# Altium PCB PCB Bottani.PcbDoc
Units mm, origin at the board's own origin, x right, y up, seen from the top; angles counter-clockwise.
Board outline 72.94 x 69.34 mm, 2 copper layers (Top Layer, Bottom Layer); 20 components, 36 nets, 133 pads, 8 vias.
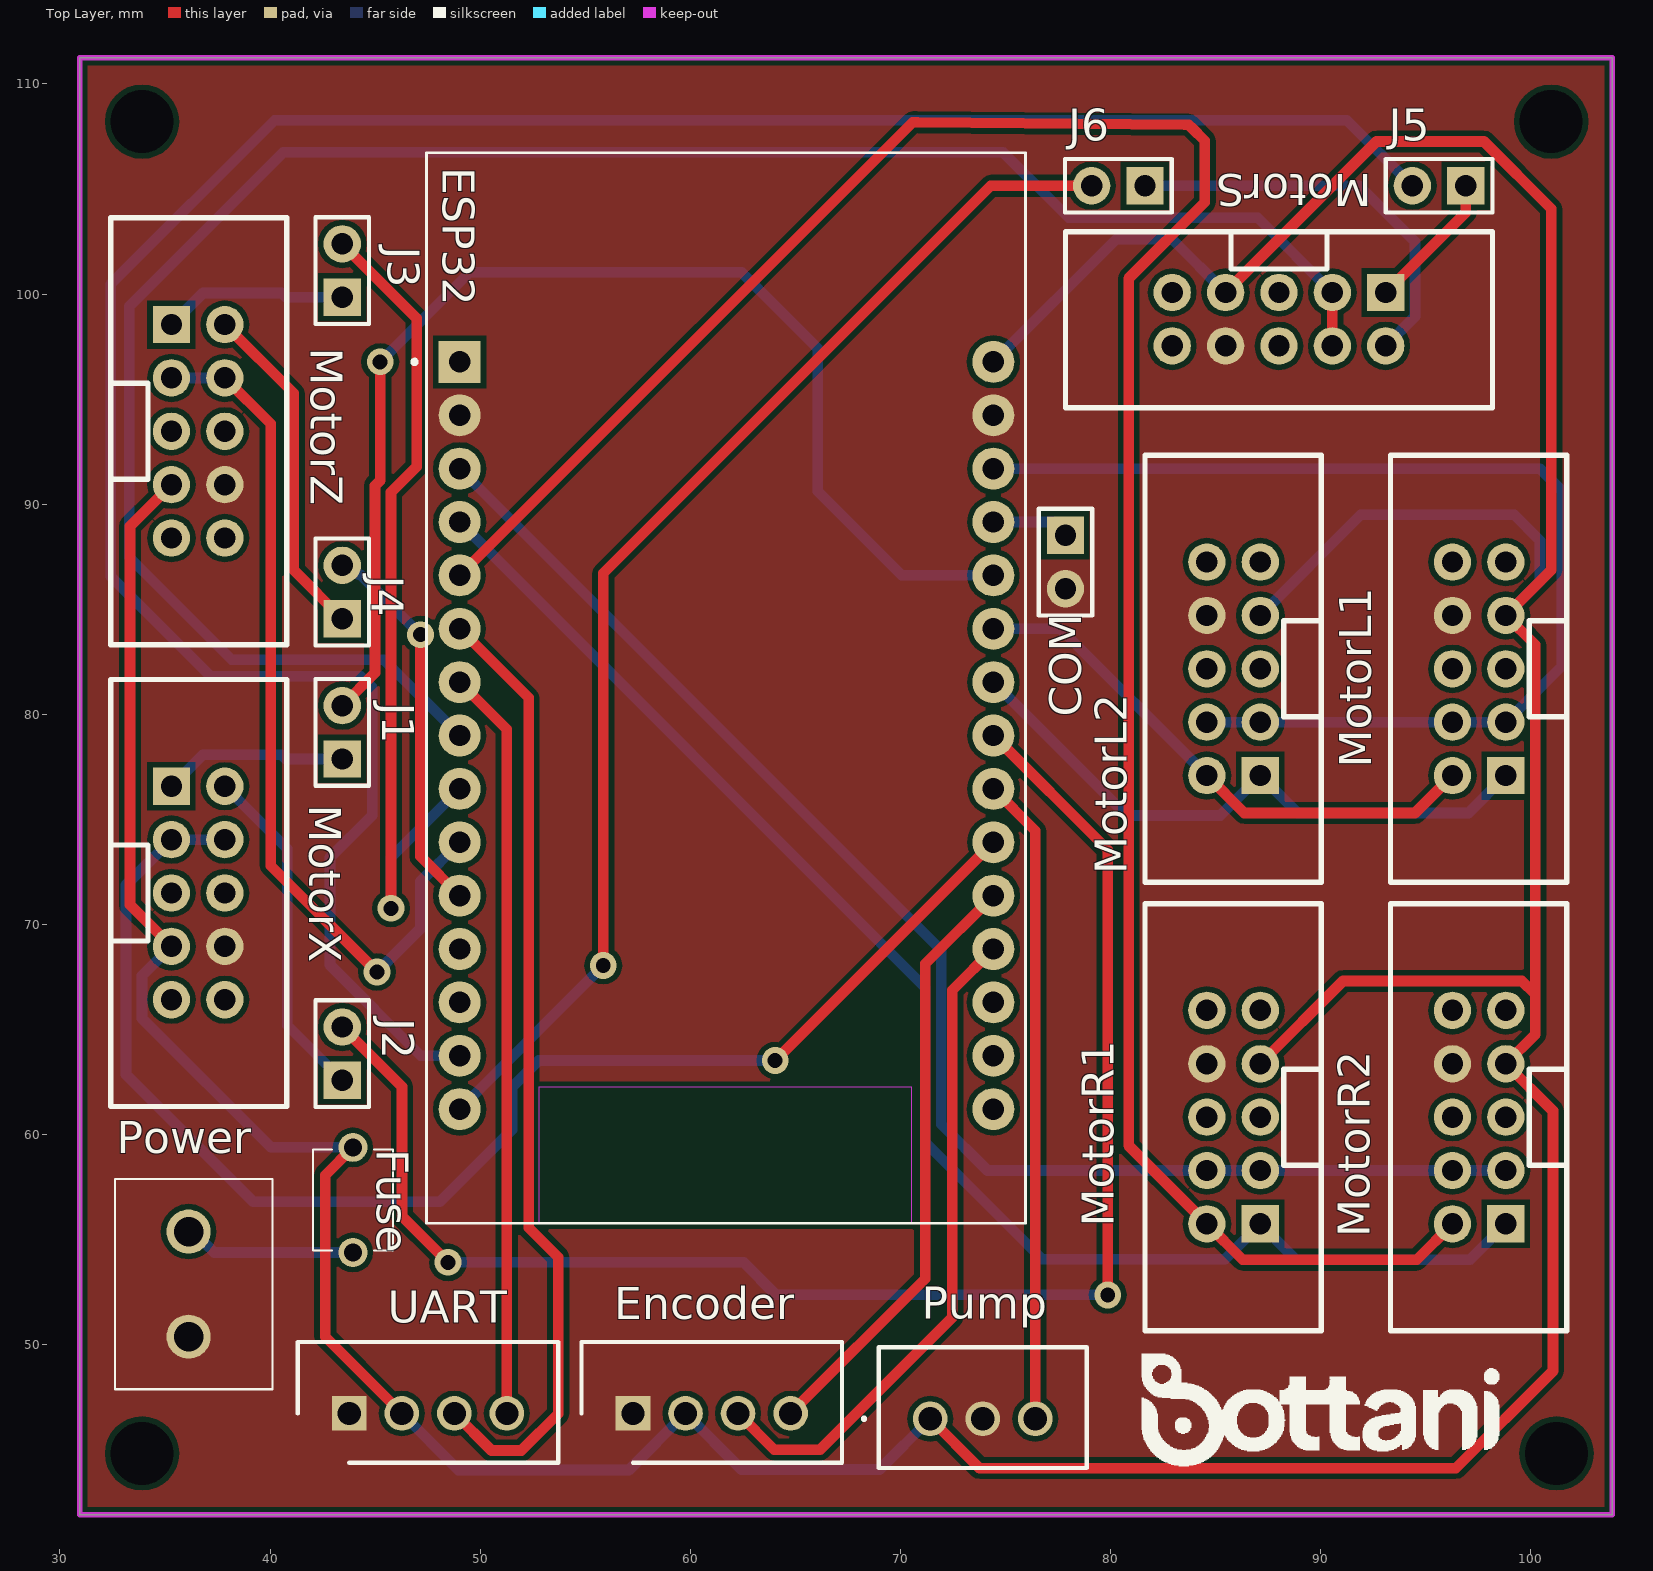
[diagram p0: Top Layer view]
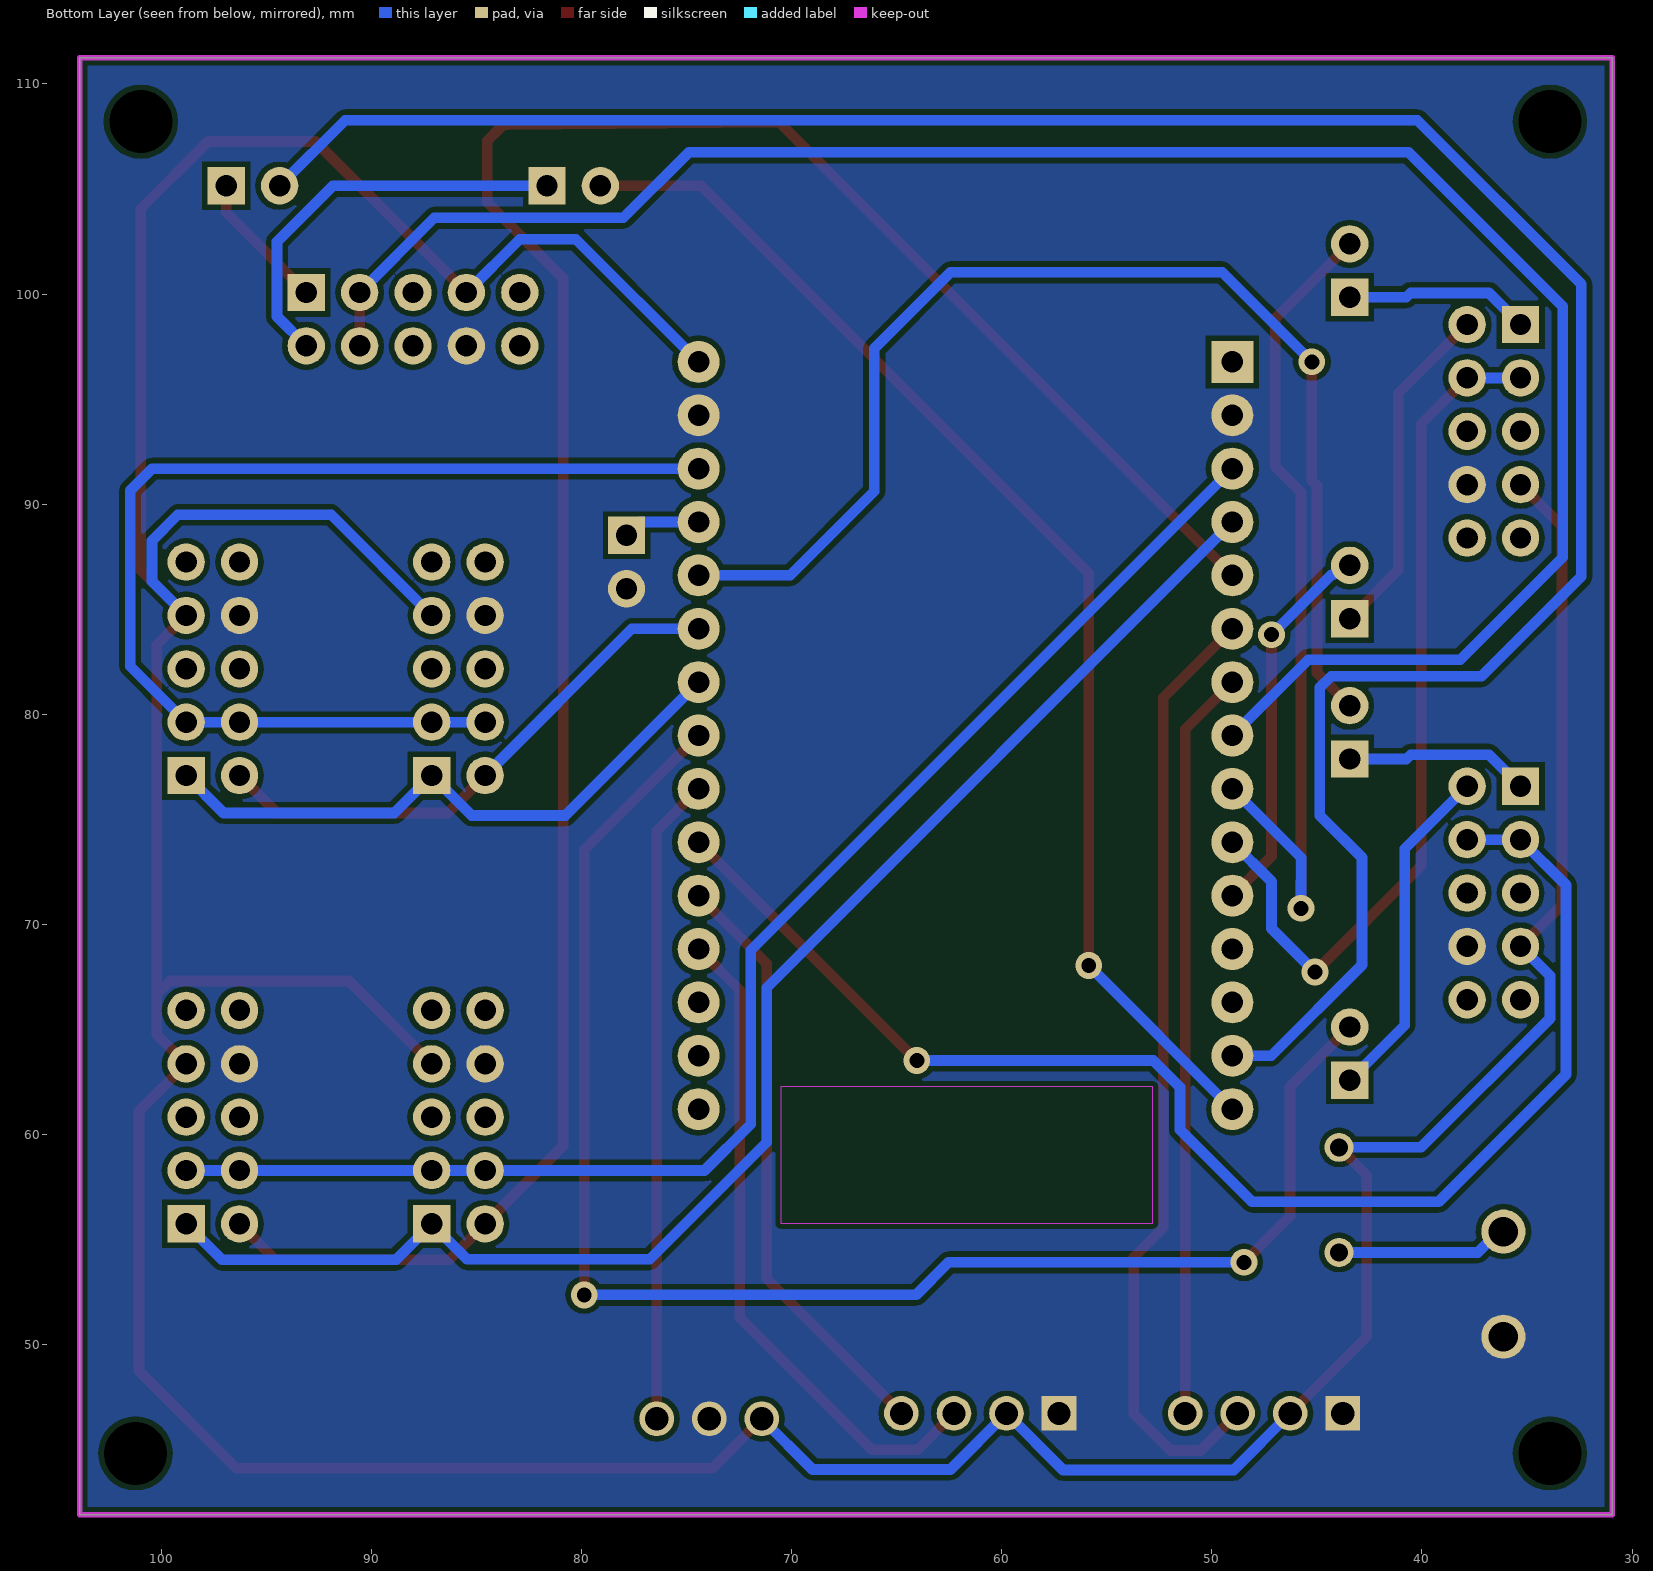
[diagram p1: Bottom Layer view, seen from below]
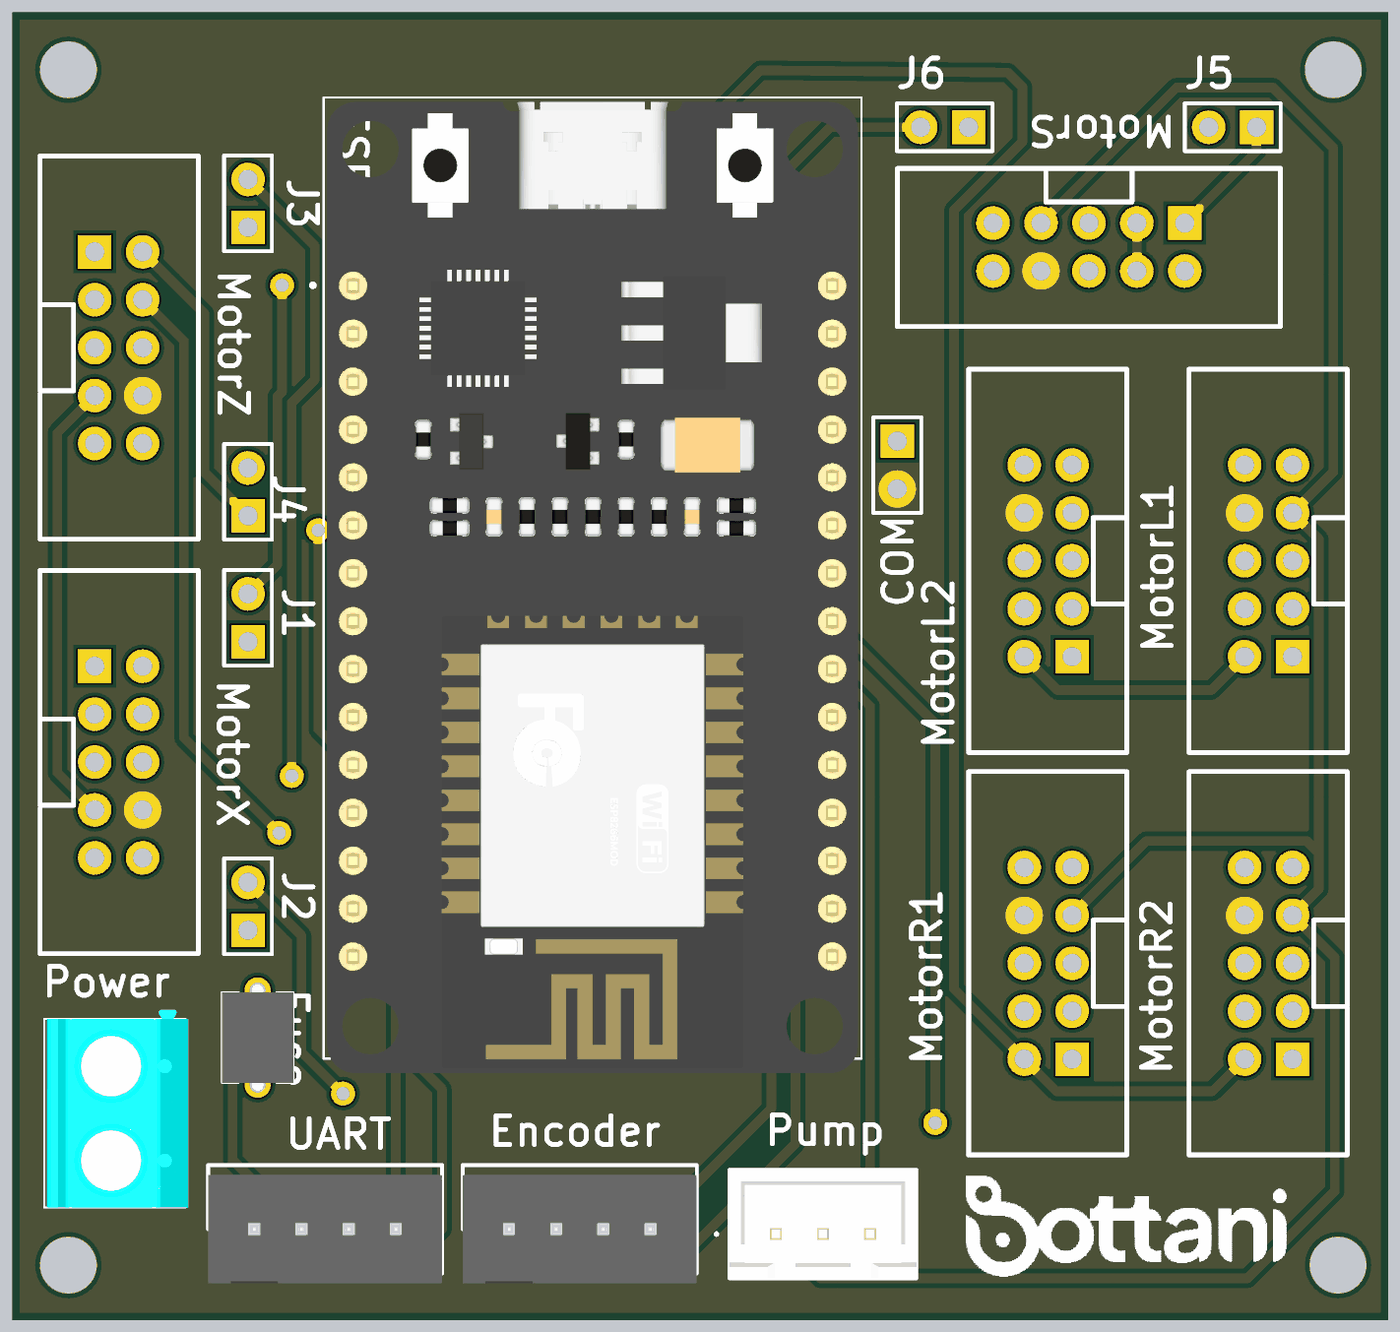
[diagram p2: 3D render of the assembled board from above, using the file's embedded part models]

## Layer stack, top to bottom
Top Solder: solder mask 0.0102, Solder Resist, Dk 3.5
Top Layer: signal copper 0.0356
Dielectric 1: dielectric 0.32, FR-4, Dk 4.8
Bottom Layer: signal copper 0.0356
Bottom Solder: solder mask 0.0102, Solder Resist, Dk 3.5

## Board outline
30.939,111.252 103.875,111.252 103.875,41.91 30.939,41.91

## Design rules (kind name [scope] priority, off if disabled: settings)
Clearance [All] p1: gap=0.254 ignorepadtopadclearanceinfootprint=FALSE except(0: Arc-Hole Track-Hole SMDPad-Hole THPad-Hole Via-Hole Fill-Hole Poly-Hole Region-Hole Text-Hole)
DiffPairsRouting [All] p1: maxlimit=0.254 minlimit=0.254 mostfreqgap=0.254 toplayer_minwidth=0.381 toplayer_maxwidth=0.381 toplayer_prefwidth=0.381 bottomlayer_minwidth=0.381 bottomlayer_maxwidth=0.381 bottomlayer_prefwidth=0.381 substack1={1001AADD-83BE-48A7-A24E-CF175915C0E7} toplayer_{1001aadd-83be-48a7-a24e-cf175915c0e7}_minwidth=0.381 toplayer_{1001aadd-83be-48a7-a24e-cf175915c0e7}_maxwidth=0.381 toplayer_{1001aadd-83be-48a7-a24e-cf175915c0e7}_prefwidth=0.381 bottomlayer_{1001aadd-83be-48a7-a24e-cf175915c0e7}_minwidth=0.381 bottomlayer_{1001aadd-83be-48a7-a24e-cf175915c0e7}_maxwidth=0.381 bottomlayer_{1001aadd-83be-48a7-a24e-cf175915c0e7}_prefwidth=0.381 substack2={67FADA1C-12DB-4CC4-97FB-3170CE7262F9} toplayer_{67fada1c-12db-4cc4-97fb-3170ce7262f9}_minwidth=0.381 toplayer_{67fada1c-12db-4cc4-97fb-3170ce7262f9}_maxwidth=0.381 toplayer_{67fada1c-12db-4cc4-97fb-3170ce7262f9}_prefwidth=0.381 bottomlayer_{67fada1c-12db-4cc4-97fb-3170ce7262f9}_minwidth=0.381 bottomlayer_{67fada1c-12db-4cc4-97fb-3170ce7262f9}_maxwidth=0.381 bottomlayer_{67fada1c-12db-4cc4-97fb-3170ce7262f9}_prefwidth=0.381 substack3={078A5EBC-2FAC-4886-BE61-738B36AD6FFA} toplayer_{078a5ebc-2fac-4886-be61-738b36ad6ffa}_minwidth=0.381 toplayer_{078a5ebc-2fac-4886-be61-738b36ad6ffa}_maxwidth=0.381 toplayer_{078a5ebc-2fac-4886-be61-738b36ad6ffa}_prefwidth=0.381 bottomlayer_{078a5ebc-2fac-4886-be61-738b36ad6ffa}_minwidth=0.381 bottomlayer_{078a5ebc-2fac-4886-be61-738b36ad6ffa}_maxwidth=0.381 bottomlayer_{078a5ebc-2fac-4886-be61-738b36ad6ffa}_prefwidth=0.381 maxuncoupledlength=12.7
PolygonConnect [All] p1: connectstyle=Direct reliefconductorwidth=0.254 reliefentries=4 polygonreliefangle="90 Angle" airgapwidth=0.254
RoutingVias [All] p1: holewidth=0.711 width=1.27 viastyle="Through Hole" minholewidth=0.711 minwidth=1.27 maxholewidth=0.711 maxwidth=1.27
SolderMaskExpansion [All] p1: expansion=0.102 istentingtop=FALSE
Width [All] p1: maxlimit=0.762 minlimit=0.254 preferedwidth=0.508 minimp=50.000000 maximp=50.000000 favimp=50.000000
29 further rules are at their usual default settings.

## Components (designator, comment, footprint, x,y, rotation, side; value= is the part's Value field where it differs from the comment)
COM "Header 2 Male" "Header 2 Male" 77.851,88.518 r270 top
Encoder "B4B-XH-A_LF__SN_" SHDR4W64P0X250_1X4_1240X575X700P 57.27,46.736 r0 top
ESP32 "ESP32-DEVKIT-V1" esp32_30p 61.722,81.259 r0 top (schematic designator U?)
Fuse "TRF250-080U" TRF250080U 43.942,56.896 r270 top
J1 "Header 2 Male" "Header 2 Male" 43.434,77.878 r90 top
J2 "Header 2 Male" "Header 2 Male" 43.434,62.584 r90 top
J3 "Header 2 Male" "Header 2 Male" 43.434,99.849 r90 top
J4 "Header 2 Male" "Header 2 Male" 43.434,84.555 r90 top
J5 "Header 2 Male" "Header 2 Male" 96.901,105.156 r180 top
J6 "Header 2 Male" "Header 2 Male" 81.634,105.156 r180 top
MotorL1 "Header ISP" "Header ISP" 101.346,79.629 r90 top
MotorL2 "Header ISP" "Header ISP" 89.662,79.629 r90 top
MotorR1 "Header ISP" "Header ISP" 89.662,58.293 r90 top
MotorR2 "Header ISP" "Header ISP" 101.346,58.293 r90 top
MotorS "Header ISP" "Header ISP" 90.551,102.616 r180 top
MotorX "Header ISP" "Header ISP" 32.766,74.041 r270 top
MotorZ "Header ISP" "Header ISP" 32.766,96.012 r270 top
Power "KF301-2P" KF3012P 36.124,55.386 r270 top
Pump "B3B-XH-A_LF__SN_" B3BXHALFSN 71.414,46.482 r0 top
UART "B4B-XH-A_LF__SN_" SHDR4W64P0X250_1X4_1240X575X700P 43.768,46.736 r0 top

## Footprints (in the part's own frame and the unit in brackets; to place one, negate y for a bottom-side part, rotate by r counter-clockwise, add the part's x,y. Pads: shape width x height; smd on the part's side, far side on the other; paste and mask are expansions set on the pad)
B3BXHALFSN [mm]
  round 1.65 hole 1.1: 1(0,0) 2(2.5,0) 3(5,0)
  silkscreen extent -3.2,-2.35 7.45,3.4, body extent -2.45,-2.35 7.45,3.4, height 7.09
esp32_30p [mm]
  rect 2x2 / inner round 2 / far side rect 2x2 hole 1.02: 1(-12.7,15.515)
  round 2 hole 1.02: 2(-12.7,12.975) 3(-12.7,10.435) 4(-12.7,7.895) 5(-12.7,5.355) 6(-12.7,2.815) 7(-12.7,0.275) 8(-12.7,-2.265) 9(-12.7,-4.805) 10(-12.7,-7.345) 11(-12.7,-9.885) 12(-12.7,-12.425) 13(-12.7,-14.965) 14(-12.7,-17.505) 15(-12.7,-20.045) 16(12.7,-20.045) 17(12.7,-17.505) 18(12.7,-14.965) 19(12.7,-12.425) 20(12.7,-9.885) 21(12.7,-7.345) 22(12.7,-4.805) 23(12.7,-2.265) 24(12.7,0.275) 25(12.7,2.815) 26(12.7,5.355) 27(12.7,7.895) 28(12.7,10.435) 29(12.7,12.975) 30(12.7,15.515)
  Keep-Out Layer region: 8.78,-25.475 -8.91,-25.475 -8.91,-18.985 8.78,-18.985
  Keep-Out Layer region: 8.78,-25.475 -8.91,-25.475 -8.91,-18.985 8.78,-18.985
  silkscreen extent -14.95,-25.48 14.23,25.48, body extent -14.1,-26.26 14.05,25.24, height 14.37
"Header 2 Male" [mil]
  rect 70x70 hole 40: 1(0,0)
  round 70 hole 40: 2(100,0)
  silkscreen extent -50,-50 150,50, body extent -50,-50 150,50, height 327
"Header ISP" [mil]
  rect 70x70 hole 40: 1(-100,100)
  round 70 hole 40: 2(-100,200) 3(0,100) 4(0,200) 5(100,100) 6(100,200) 7(200,100) 8(200,200) 9(300,100) 10(300,200)
  silkscreen extent -300,-14 500,316, body extent -300,-20 501,334, height 365
KF3012P [mm]
  round 2.1 hole 1.4: 1(0,0) 2(5,0)
  silkscreen extent -2.5,-3.5 7.5,4, body extent -2.99,-3.35 7.51,4.15, height 10
SHDR4W64P0X250_1X4_1240X575X700P [mm]
  rect 1.65x1.65 hole 1.1: 1(0,0)
  round 1.65 hole 1.1: 2(2.5,0) 3(5,0) 4(7.5,0)
  silkscreen extent -2.45,-2.35 9.95,3.4, body extent -2.45,-2.88 9.95,2.88, height 7
TRF250080U [mm]
  round 1.381 hole 0.85: 1(-2.5,0) 2(2.5,0)
  silkscreen extent -2.4,-1.9 2.4,1.9, body extent -2.82,-1.9 2.83,1.9, height 9.4

## Part data
Encoder UART: "Connector", Manufacturer_Name="JST (JAPAN SOLDERLESS TERMINALS)", Manufacturer_Part_Number=B4B-XH-A(LF)(SN), Datasheet Link=http://uk.rs-online.com/web/p/products/8201551, Height=7mm
ESP32: "Dual core, Wi-Fi: 2.4 GHz up to 150 Mbits/s,BLE (Bluetooth Low Energy) and legacy Bluetooth, 32 bits, Up to 240 MHz", Package=None, Availability="Not in stock", Check_prices=https://www.snapeda.com/parts/ESP32-DEVKIT-V1/Do+it/view-part/?ref=eda, MF="Do it", MP=ESP32-DEVKIT-V1, Price=None, SnapEDA_Link=https://www.snapeda.com/parts/ESP32-DEVKIT-V1/Do+it/view-part/?ref=snap
Fuse: "Fuse", Manufacturer_Name=LITTELFUSE, Mouser Part Number=650-TRF250-080U, Arrow Part Number=TRF250-080U, Arrow Price/Stock=https://www.arrow.com/en/products/trf250-080u/littelfuse, Datasheet Link=https://www.littelfuse.com/~/media/electronics/product_specifications/resettable_ptcs/littelfuse_ptc_trf250_080u_product_specification.pdf.pdf, Height=9.3mm, Manufacturer_Part_Number=TRF250-080U, Mouser Price/Stock=https://www.mouser.co.uk/ProductDetail/Littelfuse/TRF250-080U?qs=iWbXB9lueyAgWrbRiwwadg%3D%3D
Power: "Connector", Manufacturer_Name="Handson Technology", Datasheet Link=http://www.handsontec.com/dataspecs/terminal%20block-5mm.pdf, Height=10mm, Manufacturer_Part_Number=KF301-2P
Pump: "Connector", Arrow Part Number=B3B-XH-A(LF)(SN), Manufacturer_Name="JST (JAPAN SOLDERLESS TERMINALS)", Arrow Price/Stock=https://www.arrow.com/en/products/b3b-xh-a-lf-sn/jst-manufacturing?region=europe, Datasheet Link=https://datasheet.lcsc.com/szlcsc/1812131720_JST-Sales-America-B3B-XH-A-LF-SN_C144394.pdf, Height=7mm, Manufacturer_Part_Number=B3B-XH-A(LF)(SN)

## Free pads (board coordinates)
  round 1.524 hole 3: 46(33.909,44.831) 46(33.909,108.204) 46(100.965,108.204) 46(101.219,44.831)

## Via types
v1: diameter 1.27, hole 0.711, Top Layer to Bottom Layer, 8 vias

## Nets (pads, with @x,y where several pads share a name; then routed paths per layer and width w, separated by ;. In a path a pad name is that pad's centre, name@x,y a point inside that pad or via, vN(x,y) a via of type N, cw(c..) or ccw(c..) an arc to the next point about the centre after c; other vN are vias at no path point)
3V3: ESP32.1
5V: Encoder.2 ESP32.30 Fuse.1 MotorL1.7 MotorL2.7 MotorR1.7 MotorR2.7 MotorS.7 MotorX.7 MotorZ.7 Pump.1 UART.2 | length 244.5
  Top Layer w0.508: MotorX.7 33.331,70.936 33.331,88.957 MotorZ.7 ; Fuse.1 42.621,58.075 42.621,50.383 UART.2 ; Pump.1 73.764,44.132 96.431,44.132 101.049,48.75 101.049,61.13 MotorR2.7 100.203,64.77 100.203,66.675 ; MotorS.7 92.656,107.261 97.767,107.261 100.965,104.064 100.965,86.868 MotorL1.7 100.203,83.312 100.203,66.675 ; MotorR1.7 91.059,67.31 99.568,67.31 100.203,66.675
  Bottom Layer w0.508: MotorX.7 33.909,67.564 33.909,65.532 40.045,59.396 Fuse.1 ; UART.2 48.96,44.044 57.078,44.044 Encoder.2 62.437,44.069 69.001,44.069 Pump.1 ; ESP32.30 80.264,102.616 82.931,102.616 MotorS.7 ; MotorL2.7 91.907,89.494 99.203,89.494 100.432,88.266 100.432,86.335 MotorL1.7
5V_Source: Fuse.2 Power.1 | length 8.2
  Bottom Layer w0.508: Power.1 36.354,55.386 37.344,54.396 Fuse.2
D2: ESP32.4 MotorR1.1 MotorR2.1 | length 70.7
  Bottom Layer w0.508: ESP32.4 71.182,66.994 71.182,59.639 76.749,54.072 85.441,54.072 MotorR1.1 88.824,54.051 97.104,54.051 MotorR2.1
D4: ESP32.5 MotorR1.2 MotorR2.2 | length 112.4
  Top Layer w0.508: ESP32.5 70.581,108.173 70.794,108.173 83.515,108.056 83.723,108.054 83.87,107.907 84.485,107.292 84.485,104.376 80.855,100.745 80.855,59.48 MotorR1.2 86.284,54.051 94.564,54.051 MotorR2.2
D5: ESP32.8 MotorS.3 MotorS.4 | length 96.8
  Top Layer w0.508: MotorS.4 MotorS.3
  Bottom Layer w0.508: ESP32.8 45.415,82.601 38.176,82.601 33.294,87.483 33.294,99.409 40.641,106.756 74.879,106.756 78.003,103.632 86.995,103.632 MotorS.3
D12: COM.1 ESP32.27 | length 3.7
  Bottom Layer w0.508: ESP32.27 77.215,89.154 COM.1
D13: ESP32.28 MotorL1.3 MotorL1.4 MotorL2.3 MotorL2.4 | length 53.8
  Bottom Layer w0.508: ESP32.28 100.432,91.694 101.47,90.656 101.47,82.293 MotorL1.3 MotorL1.4 MotorL2.3 MotorL2.4
D14: ESP32.26 J1.2 | length 58
  Top Layer w0.508: J1.2 44.991,81.975 44.991,90.884 45.239,91.131 v1(45.239,96.774)
  Bottom Layer w0.508: v1(45.239,96.774) 49.502,101.037 62.437,101.037 66.064,97.41 66.064,90.613 70.063,86.614 ESP32.26
D15: ESP32.3 MotorR1.3 MotorR1.4 MotorR2.3 MotorR2.4 | length 68.5
  Bottom Layer w0.508: ESP32.3 71.944,68.772 71.944,60.493 74.144,58.293 MotorR1.4 MotorR1.3 MotorR2.4 MotorR2.3
D18: ESP32.9 J3.2 | length 40.6
  Top Layer w0.508: J3.2 46.972,98.851 46.972,91.787 45.753,90.568 v1(45.753,70.769)
  Bottom Layer w0.508: v1(45.753,70.769) 45.753,72.046 45.739,72.061 45.739,73.171 ESP32.9
D19: ESP32.10 MotorZ.3 MotorZ.4 | length 41.6
  Top Layer w0.508: MotorZ.4 40.03,93.828 40.03,72.796 v1(45.085,67.742)
  Bottom Layer w0.508: MotorZ.3 MotorZ.4 ; v1(45.085,67.742) 47.154,69.811 47.154,72.046 ESP32.10
D21: ESP32.11 J4.2 | length 18.3
  Top Layer w0.508: v1(47.154,83.793) 47.154,73.242 ESP32.11
  Bottom Layer w0.508: J4.2 43.778,87.095 44.228,86.645 44.302,86.645 v1(47.154,83.793)
D22: ESP32.14 J5.2 | length 117
  Bottom Layer w0.508: ESP32.14 47.168,63.754 42.85,68.072 42.85,73.185 44.856,75.192 44.856,81.28 44.321,81.815 37.163,81.815 32.41,86.568 32.41,100.468 40.223,108.28 91.237,108.28 J5.2
D23: ESP32.15 J6.2 | length 59.2
  Top Layer w0.508: v1(55.855,68.047) 55.855,86.716 74.295,105.156 J6.2
  Bottom Layer w0.508: ESP32.15 v1(55.855,68.047)
D25: ESP32.23 J2.2 | length 74.2
  Top Layer w0.508: J2.2 46.274,62.284 46.274,56.114 48.463,53.924 v1(48.47,53.924) ; ESP32.23 79.864,73.552 v1(79.864,52.374)
  Bottom Layer w0.508: v1(48.47,53.924) 62.526,53.924 64.076,52.374 v1(79.864,52.374)
D26: ESP32.24 MotorL1.1 MotorL2.1 | length 29.3
  Bottom Layer w0.508: ESP32.24 80.772,75.184 85.217,75.184 MotorL2.1 88.902,75.309 97.026,75.309 MotorL1.1
D27: ESP32.25 MotorL1.2 MotorL2.2 | length 26.2
  Top Layer w0.508: MotorL2.2 86.362,75.309 94.486,75.309 MotorL1.2
  Bottom Layer w0.508: ESP32.25 77.597,84.074 MotorL2.2
D32: ESP32.21 MotorX.3 MotorX.4 | length 66.7
  Top Layer w0.508: v1(64.033,63.525) ESP32.21
  Bottom Layer w0.508: MotorX.4 MotorX.3 33.147,71.882 33.147,62.865 39.212,56.8 48.07,56.8 51.511,60.241 51.511,62.25 52.787,63.525 v1(64.033,63.525)
D33: ESP32.22 Pump.3 | length 30.8
  Top Layer w0.508: ESP32.22 76.414,74.462 Pump.3
D34: Encoder.3 ESP32.19 | length 31.9
  Top Layer w0.508: Encoder.3 63.997,45.009 66.172,45.009 72.461,51.297 72.461,66.873 ESP32.19
D35: Encoder.4 ESP32.20 | length 28.6
  Top Layer w0.508: Encoder.4 71.182,53.148 71.182,68.134 ESP32.20
EN: ESP32.16
GND: COM.2 Encoder.1 ESP32.2 ESP32.29 MotorL1.8 MotorL2.8 MotorR1.8 MotorR2.8 MotorS.8 MotorX.8 MotorZ.8 Power.2 Pump.2 UART.1
RX0: ESP32.12
RX2: ESP32.6 UART.3 | length 45.7
  Top Layer w0.508: UART.3 50.538,44.966 51.959,44.966 53.718,46.725 53.718,54.16 52.304,55.574 52.304,80.792 ESP32.6
SForward: J5.1 MotorS.1 | length 6.7
  Top Layer w0.508: MotorS.1 96.901,103.886 J5.1
SReverse: J6.1 MotorS.2 | length 19.5
  Bottom Layer w0.508: J6.1 91.821,105.156 94.488,102.489 94.488,98.933 MotorS.2
TX0: ESP32.13
TX2: ESP32.7 UART.4 | length 35.7
  Top Layer w0.508: ESP32.7 51.268,79.288 UART.4
VN: ESP32.18
VP: ESP32.17
XForward: J1.1 MotorX.1 | length 8.8
  Bottom Layer w0.508: MotorX.1 36.805,78.08 40.538,78.08 40.74,77.878 J1.1
XReverse: J2.1 MotorX.2 | length 16.3
  Bottom Layer w0.508: MotorX.2 40.818,73.609 40.818,65.2 J2.1
ZForward: J3.1 MotorZ.1 | length 8.8
  Bottom Layer w0.508: MotorZ.1 36.805,100.051 40.538,100.051 40.74,99.849 J3.1
ZReverse: J4.1 MotorZ.2 | length 16.3
  Top Layer w0.508: MotorZ.2 41.123,95.275 41.123,86.866 J4.1
pads on no net: MotorL1.5 MotorL1.6 MotorL1.9 MotorL1.10 MotorL2.5 MotorL2.6 MotorL2.9 MotorL2.10 MotorR1.5 MotorR1.6 MotorR1.9 MotorR1.10 MotorR2.5 MotorR2.6 MotorR2.9 MotorR2.10 MotorS.5 MotorS.6 MotorS.9 MotorS.10 MotorX.5 MotorX.6 MotorX.9 MotorX.10 MotorZ.5 MotorZ.6 MotorZ.9 MotorZ.10

## Polygon pours and split planes (outlines as drawn)
GND on Top Layer "GND_L01_P001" (solid, remove dead copper, pour order 1): 30.939,41.91 103.875,41.91 103.875,111.252 30.939,111.252
GND on Bottom Layer "GND_L02_P000" (solid, remove dead copper, pour order 0): 30.939,41.91 103.875,41.91 103.875,111.252 30.939,111.252

## Keep-outs
Keep-Out Layer:
  the board outline again, w0.254

## Silkscreen, mask and mechanical layers (free items; w line width, h text height)
Top Overlay:
  drawing of 6 lines, arcs and shapes, not listed